# Altium PCB PCB2.PcbDoc
Units mil, origin at the board's own origin, x right, y up, seen from the top; angles counter-clockwise.
Board outline 6000 x 4000 mil, 2 copper layers (Top Layer, Bottom Layer); 4 components, 0 nets, 228 pads, 0 vias.
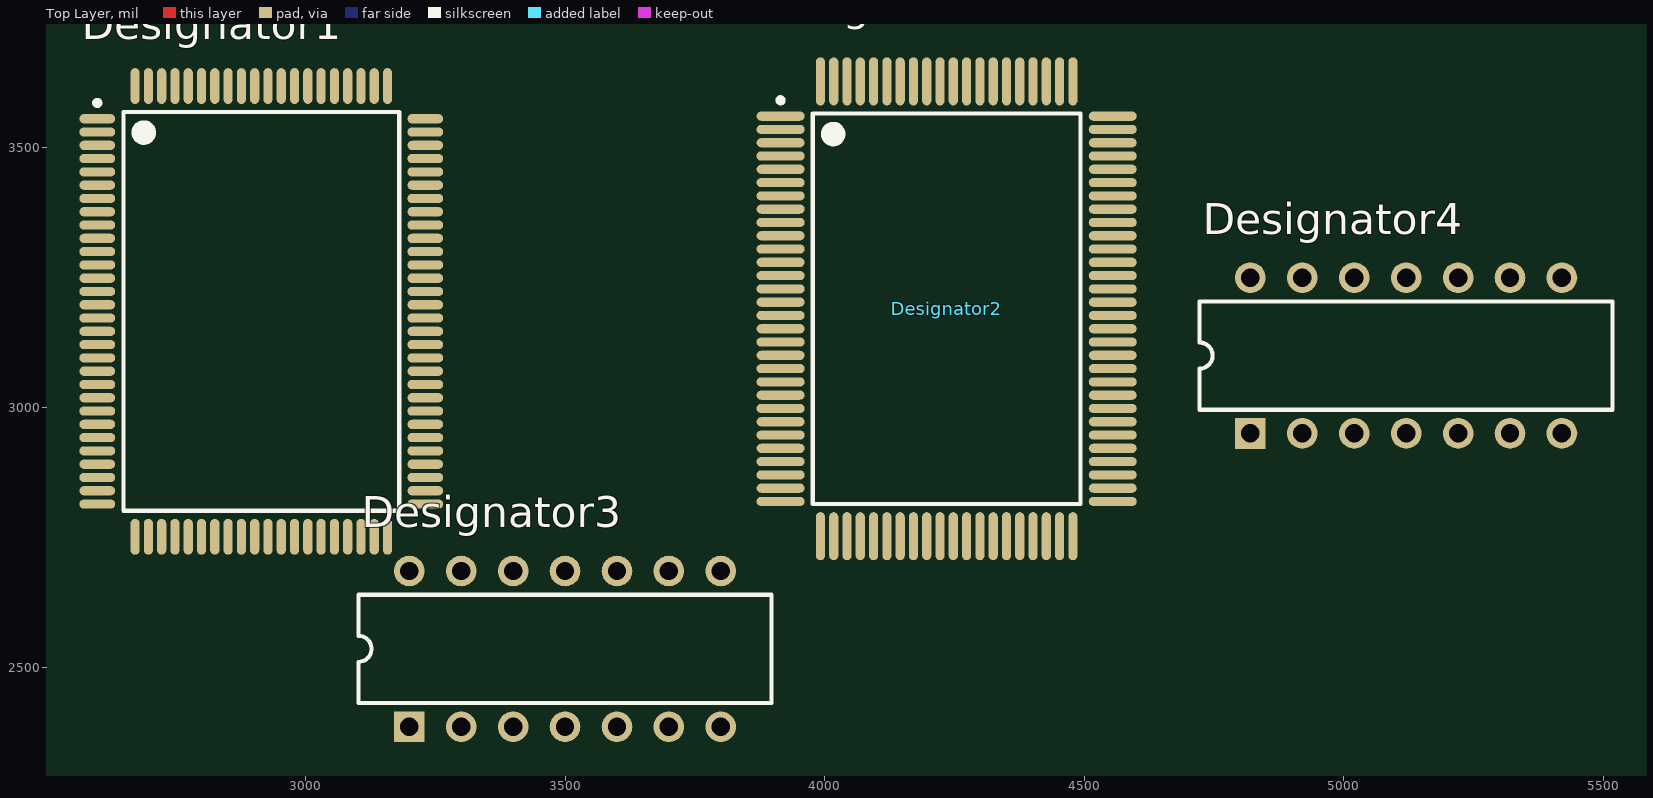
[diagram p0: Top Layer view]
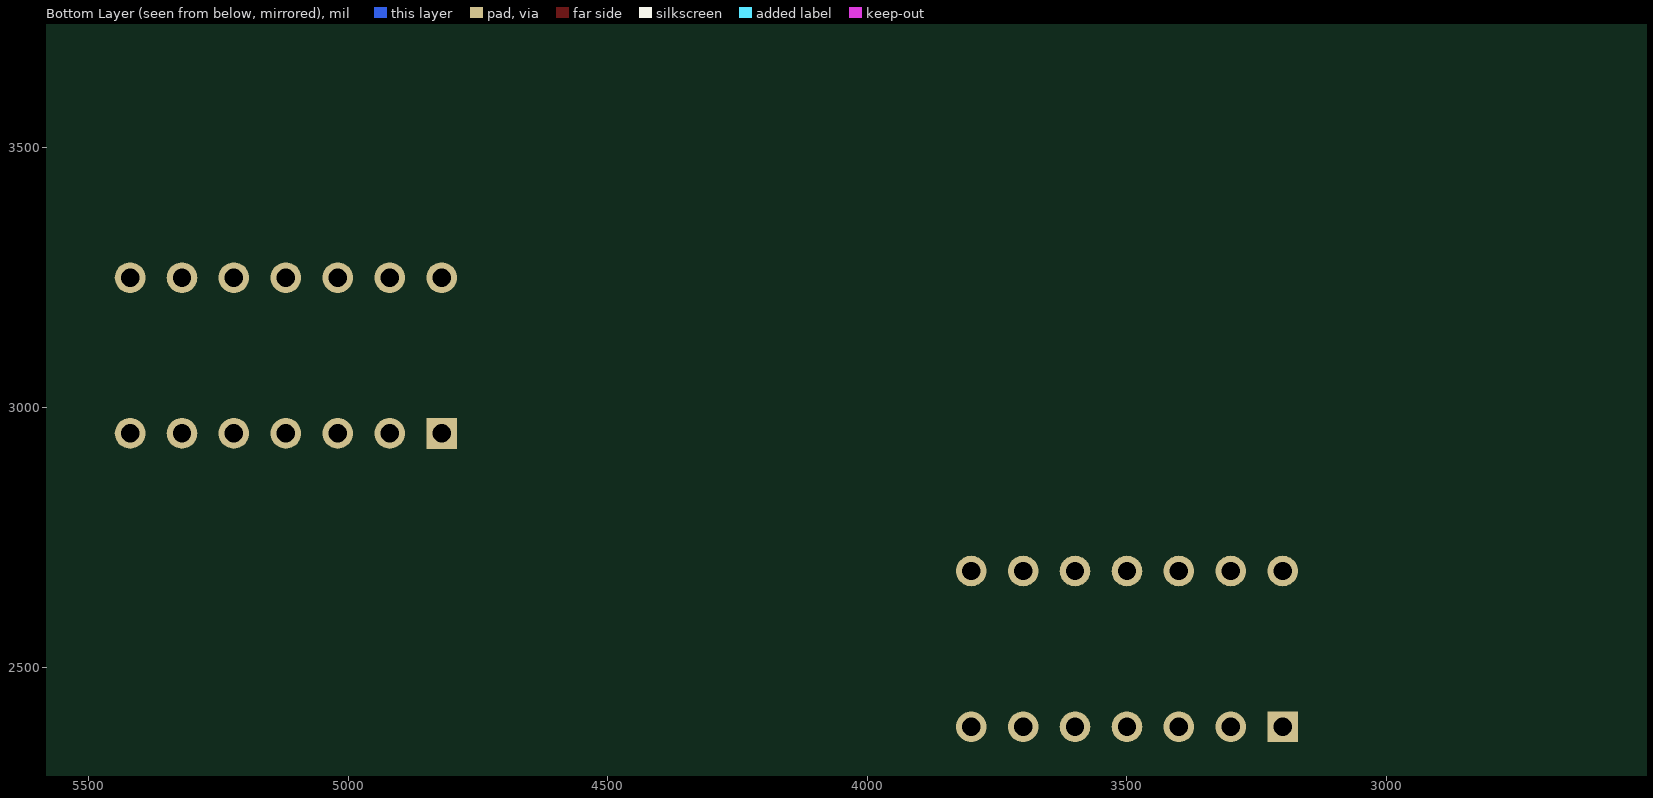
[diagram p1: Bottom Layer view, seen from below]

## Layer stack, top to bottom
Top Solder: solder mask 0.4, Solder Resist, Dk 3.5
Top Layer: signal copper 1.4
Dielectric 1: dielectric 12.6, FR-4, Dk 4.8
Bottom Layer: signal copper 1.4
Bottom Solder: solder mask 0.4, Solder Resist, Dk 3.5

## Board outline
1000,1000 7000,1000 7000,5000 1000,5000

## Design rules (kind name [scope] priority, off if disabled: settings)
Clearance [All] p1: gap=10
PolygonConnect [All] p1: connectstyle=Relief reliefconductorwidth=10 reliefentries=4 polygonreliefangle="90 Angle" airgapwidth=10
RoutingVias [All] p1: holewidth=28 width=50 viastyle="Through Hole" minholewidth=28 minwidth=50 maxholewidth=28 maxwidth=50
SolderMaskExpansion [All] p1: expansion=4
Width [All] p1: maxlimit=10 minlimit=10 preferedwidth=10
29 further rules are at their usual default settings.

## Components (designator, comment, footprint, x,y, rotation, side; value= is the part's Value field where it differs from the comment)
Designator1 "Comment" PQFP100_L 2915,3185 r0 top
Designator2 "Comment" PQFP100_M 4235,3190 r0 top
Designator3 "Comment" DIP14 3500,2535 r0 top
Designator4 "Comment" DIP14 5120,3100 r0 top

## Footprints (in the part's own frame and the unit in brackets; to place one, negate y for a bottom-side part, rotate by r counter-clockwise, add the part's x,y. Pads: shape width x height; smd on the part's side, far side on the other; paste and mask are expansions set on the pad)
DIP14 [mm] "DIP; 14 Leads; Row Spacing 7.62 mm; Pitch 2.54 mm"
  rect 1.5x1.5 hole 0.9: 1(-7.62,-3.81)
  round 1.5 hole 0.9: 2(-5.08,-3.81) 3(-2.54,-3.81) 4(0,-3.81) 5(2.54,-3.81) 6(5.08,-3.81) 7(7.62,-3.81) 8(7.62,3.81) 9(5.08,3.81) 10(2.54,3.81) 11(0,3.81) 12(-2.54,3.81) 13(-5.08,3.81) 14(-7.62,3.81)
  silkscreen extent -10.1,-2.65 10.1,2.65
PQFP100_L [mm] "100-Pin Plastic Quad Flat Pack Rectangular 0.65 mm Pitch, IPC High Density"
  oval 1.75x0.45 smd: 1(-8.025,9.425) 2(-8.025,8.775) 3(-8.025,8.125) 4(-8.025,7.475) 5(-8.025,6.825) 6(-8.025,6.175) 7(-8.025,5.525) 8(-8.025,4.875) 9(-8.025,4.225) 10(-8.025,3.575) 11(-8.025,2.925) 12(-8.025,2.275) 13(-8.025,1.625) 14(-8.025,0.975) 15(-8.025,0.325) 16(-8.025,-0.325) 17(-8.025,-0.975) 18(-8.025,-1.625) 19(-8.025,-2.275) 20(-8.025,-2.925) 21(-8.025,-3.575) 22(-8.025,-4.225) 23(-8.025,-4.875) 24(-8.025,-5.525) 25(-8.025,-6.175) 26(-8.025,-6.825) 27(-8.025,-7.475) 28(-8.025,-8.125) 29(-8.025,-8.775) 30(-8.025,-9.425) 51(8.025,-9.425) 52(8.025,-8.775) 53(8.025,-8.125) 54(8.025,-7.475) 55(8.025,-6.825) 56(8.025,-6.175) 57(8.025,-5.525) 58(8.025,-4.875) 59(8.025,-4.225) 60(8.025,-3.575) 61(8.025,-2.925) 62(8.025,-2.275) 63(8.025,-1.625) 64(8.025,-0.975) 65(8.025,-0.325) 66(8.025,0.325) 67(8.025,0.975) 68(8.025,1.625) 69(8.025,2.275) 70(8.025,2.925) 71(8.025,3.575) 72(8.025,4.225) 73(8.025,4.875) 74(8.025,5.525) 75(8.025,6.175) 76(8.025,6.825) 77(8.025,7.475) 78(8.025,8.125) 79(8.025,8.775) 80(8.025,9.425)
  oval 0.45x1.75 smd: 31(-6.175,-11.025) 32(-5.525,-11.025) 33(-4.875,-11.025) 34(-4.225,-11.025) 35(-3.575,-11.025) 36(-2.925,-11.025) 37(-2.275,-11.025) 38(-1.625,-11.025) 39(-0.975,-11.025) 40(-0.325,-11.025) 41(0.325,-11.025) 42(0.975,-11.025) 43(1.625,-11.025) 44(2.275,-11.025) 45(2.925,-11.025) 46(3.575,-11.025) 47(4.225,-11.025) 48(4.875,-11.025) 49(5.525,-11.025) 50(6.175,-11.025) 81(6.175,11.025) 82(5.525,11.025) 83(4.875,11.025) 84(4.225,11.025) 85(3.575,11.025) 86(2.925,11.025) 87(2.275,11.025) 88(1.625,11.025) 89(0.975,11.025) 90(0.325,11.025) 91(-0.325,11.025) 92(-0.975,11.025) 93(-1.625,11.025) 94(-2.275,11.025) 95(-2.925,11.025) 96(-3.575,11.025) 97(-4.225,11.025) 98(-4.875,11.025) 99(-5.525,11.025) 100(-6.175,11.025)
  silkscreen extent -8.15,-9.75 6.75,10.32, body extent -7,-10 7,10, height 3.4
PQFP100_M [mm] "100-Pin Plastic Quad Flat Pack Rectangular 0.65 mm Pitch, IPC Low Density"
  oval 2.35x0.45 smd: 1(-8.125,9.425) 2(-8.125,8.775) 3(-8.125,8.125) 4(-8.125,7.475) 5(-8.125,6.825) 6(-8.125,6.175) 7(-8.125,5.525) 8(-8.125,4.875) 9(-8.125,4.225) 10(-8.125,3.575) 11(-8.125,2.925) 12(-8.125,2.275) 13(-8.125,1.625) 14(-8.125,0.975) 15(-8.125,0.325) 16(-8.125,-0.325) 17(-8.125,-0.975) 18(-8.125,-1.625) 19(-8.125,-2.275) 20(-8.125,-2.925) 21(-8.125,-3.575) 22(-8.125,-4.225) 23(-8.125,-4.875) 24(-8.125,-5.525) 25(-8.125,-6.175) 26(-8.125,-6.825) 27(-8.125,-7.475) 28(-8.125,-8.125) 29(-8.125,-8.775) 30(-8.125,-9.425) 51(8.125,-9.425) 52(8.125,-8.775) 53(8.125,-8.125) 54(8.125,-7.475) 55(8.125,-6.825) 56(8.125,-6.175) 57(8.125,-5.525) 58(8.125,-4.875) 59(8.125,-4.225) 60(8.125,-3.575) 61(8.125,-2.925) 62(8.125,-2.275) 63(8.125,-1.625) 64(8.125,-0.975) 65(8.125,-0.325) 66(8.125,0.325) 67(8.125,0.975) 68(8.125,1.625) 69(8.125,2.275) 70(8.125,2.925) 71(8.125,3.575) 72(8.125,4.225) 73(8.125,4.875) 74(8.125,5.525) 75(8.125,6.175) 76(8.125,6.825) 77(8.125,7.475) 78(8.125,8.125) 79(8.125,8.775) 80(8.125,9.425)
  oval 0.45x2.35 smd: 31(-6.175,-11.125) 32(-5.525,-11.125) 33(-4.875,-11.125) 34(-4.225,-11.125) 35(-3.575,-11.125) 36(-2.925,-11.125) 37(-2.275,-11.125) 38(-1.625,-11.125) 39(-0.975,-11.125) 40(-0.325,-11.125) 41(0.325,-11.125) 42(0.975,-11.125) 43(1.625,-11.125) 44(2.275,-11.125) 45(2.925,-11.125) 46(3.575,-11.125) 47(4.225,-11.125) 48(4.875,-11.125) 49(5.525,-11.125) 50(6.175,-11.125) 81(6.175,11.125) 82(5.525,11.125) 83(4.875,11.125) 84(4.225,11.125) 85(3.575,11.125) 86(2.925,11.125) 87(2.275,11.125) 88(1.625,11.125) 89(0.975,11.125) 90(0.325,11.125) 91(-0.325,11.125) 92(-0.975,11.125) 93(-1.625,11.125) 94(-2.275,11.125) 95(-2.925,11.125) 96(-3.575,11.125) 97(-4.225,11.125) 98(-4.875,11.125) 99(-5.525,11.125) 100(-6.175,11.125)
  silkscreen extent -8.25,-9.55 6.55,10.32, body extent -7,-10 7,10, height 3.4

## Nets (pads, with @x,y where several pads share a name; then routed paths per layer and width w, separated by ;. In a path a pad name is that pad's centre, name@x,y a point inside that pad or via, vN(x,y) a via of type N, cw(c..) or ccw(c..) an arc to the next point about the centre after c; other vN are vias at no path point)
pads on no net: Designator1.1 Designator1.2 Designator1.3 Designator1.4 Designator1.5 Designator1.6 Designator1.7 Designator1.8 Designator1.9 Designator1.10 Designator1.11 Designator1.12 Designator1.13 Designator1.14 Designator1.15 Designator1.16 Designator1.17 Designator1.18 Designator1.19 Designator1.20 Designator1.21 Designator1.22 Designator1.23 Designator1.24 Designator1.25 Designator1.26 Designator1.27 Designator1.28 Designator1.29 Designator1.30 Designator1.31 Designator1.32 Designator1.33 Designator1.34 Designator1.35 Designator1.36 Designator1.37 Designator1.38 Designator1.39 Designator1.40 Designator1.41 Designator1.42 Designator1.43 Designator1.44 Designator1.45 Designator1.46 Designator1.47 Designator1.48 Designator1.49 Designator1.50 Designator1.51 Designator1.52 Designator1.53 Designator1.54 Designator1.55 Designator1.56 Designator1.57 Designator1.58 Designator1.59 Designator1.60 Designator1.61 Designator1.62 Designator1.63 Designator1.64 Designator1.65 Designator1.66 Designator1.67 Designator1.68 Designator1.69 Designator1.70 Designator1.71 Designator1.72 Designator1.73 Designator1.74 Designator1.75 Designator1.76 Designator1.77 Designator1.78 Designator1.79 Designator1.80 Designator1.81 Designator1.82 Designator1.83 Designator1.84 Designator1.85 Designator1.86 Designator1.87 Designator1.88 Designator1.89 Designator1.90 Designator1.91 Designator1.92 Designator1.93 Designator1.94 Designator1.95 Designator1.96 Designator1.97 Designator1.98 Designator1.99 Designator1.100 Designator2.1 Designator2.2 Designator2.3 Designator2.4 Designator2.5 Designator2.6 Designator2.7 Designator2.8 Designator2.9 Designator2.10 Designator2.11 Designator2.12 Designator2.13 Designator2.14 Designator2.15 Designator2.16 Designator2.17 Designator2.18 Designator2.19 Designator2.20 Designator2.21 Designator2.22 Designator2.23 Designator2.24 Designator2.25 Designator2.26 Designator2.27 Designator2.28 Designator2.29 Designator2.30 Designator2.31 Designator2.32 Designator2.33 Designator2.34 Designator2.35 Designator2.36 Designator2.37 Designator2.38 Designator2.39 Designator2.40 Designator2.41 Designator2.42 Designator2.43 Designator2.44 Designator2.45 Designator2.46 Designator2.47 Designator2.48 Designator2.49 Designator2.50 Designator2.51 Designator2.52 Designator2.53 Designator2.54 Designator2.55 Designator2.56 Designator2.57 Designator2.58 Designator2.59 Designator2.60 Designator2.61 Designator2.62 Designator2.63 Designator2.64 Designator2.65 Designator2.66 Designator2.67 Designator2.68 Designator2.69 Designator2.70 Designator2.71 Designator2.72 Designator2.73 Designator2.74 Designator2.75 Designator2.76 Designator2.77 Designator2.78 Designator2.79 Designator2.80 Designator2.81 Designator2.82 Designator2.83 Designator2.84 Designator2.85 Designator2.86 Designator2.87 Designator2.88 Designator2.89 Designator2.90 Designator2.91 Designator2.92 Designator2.93 Designator2.94 Designator2.95 Designator2.96 Designator2.97 Designator2.98 Designator2.99 Designator2.100 Designator3.1 Designator3.2 Designator3.3 Designator3.4 Designator3.5 Designator3.6 Designator3.7 Designator3.8 Designator3.9 Designator3.10 Designator3.11 Designator3.12 Designator3.13 Designator3.14 Designator4.1 Designator4.2 Designator4.3 Designator4.4 Designator4.5 Designator4.6 Designator4.7 Designator4.8 Designator4.9 Designator4.10 Designator4.11 Designator4.12 Designator4.13 Designator4.14